# Altium PCB OpticalSensor.PcbDoc
Units mm, origin at the board's own origin, x right, y up, seen from the top; angles counter-clockwise.
Board outline 33 x 33 mm, 2 copper layers (Top Layer, Bottom Layer), stack 1.071 mm thick; 28 components, 19 nets, 149 pads, 34 vias.
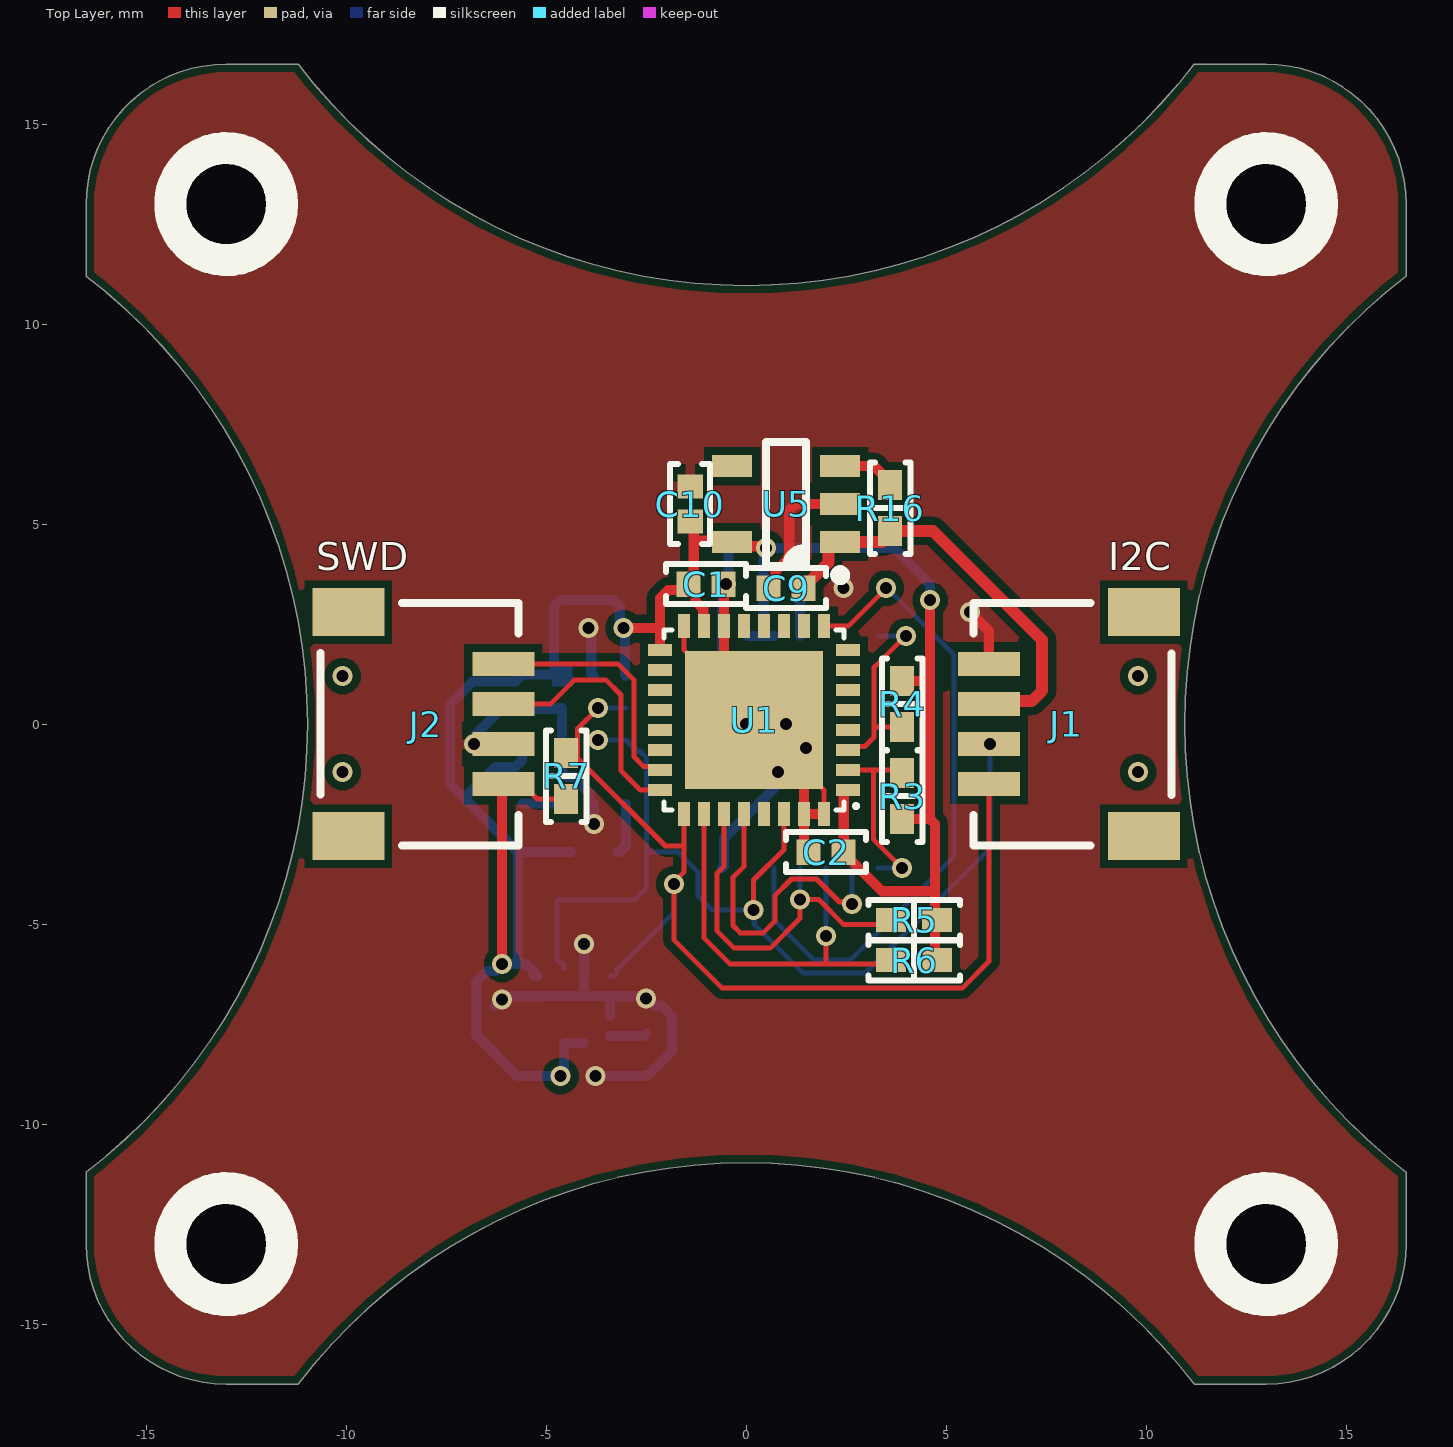
[diagram p0: Top Layer view]
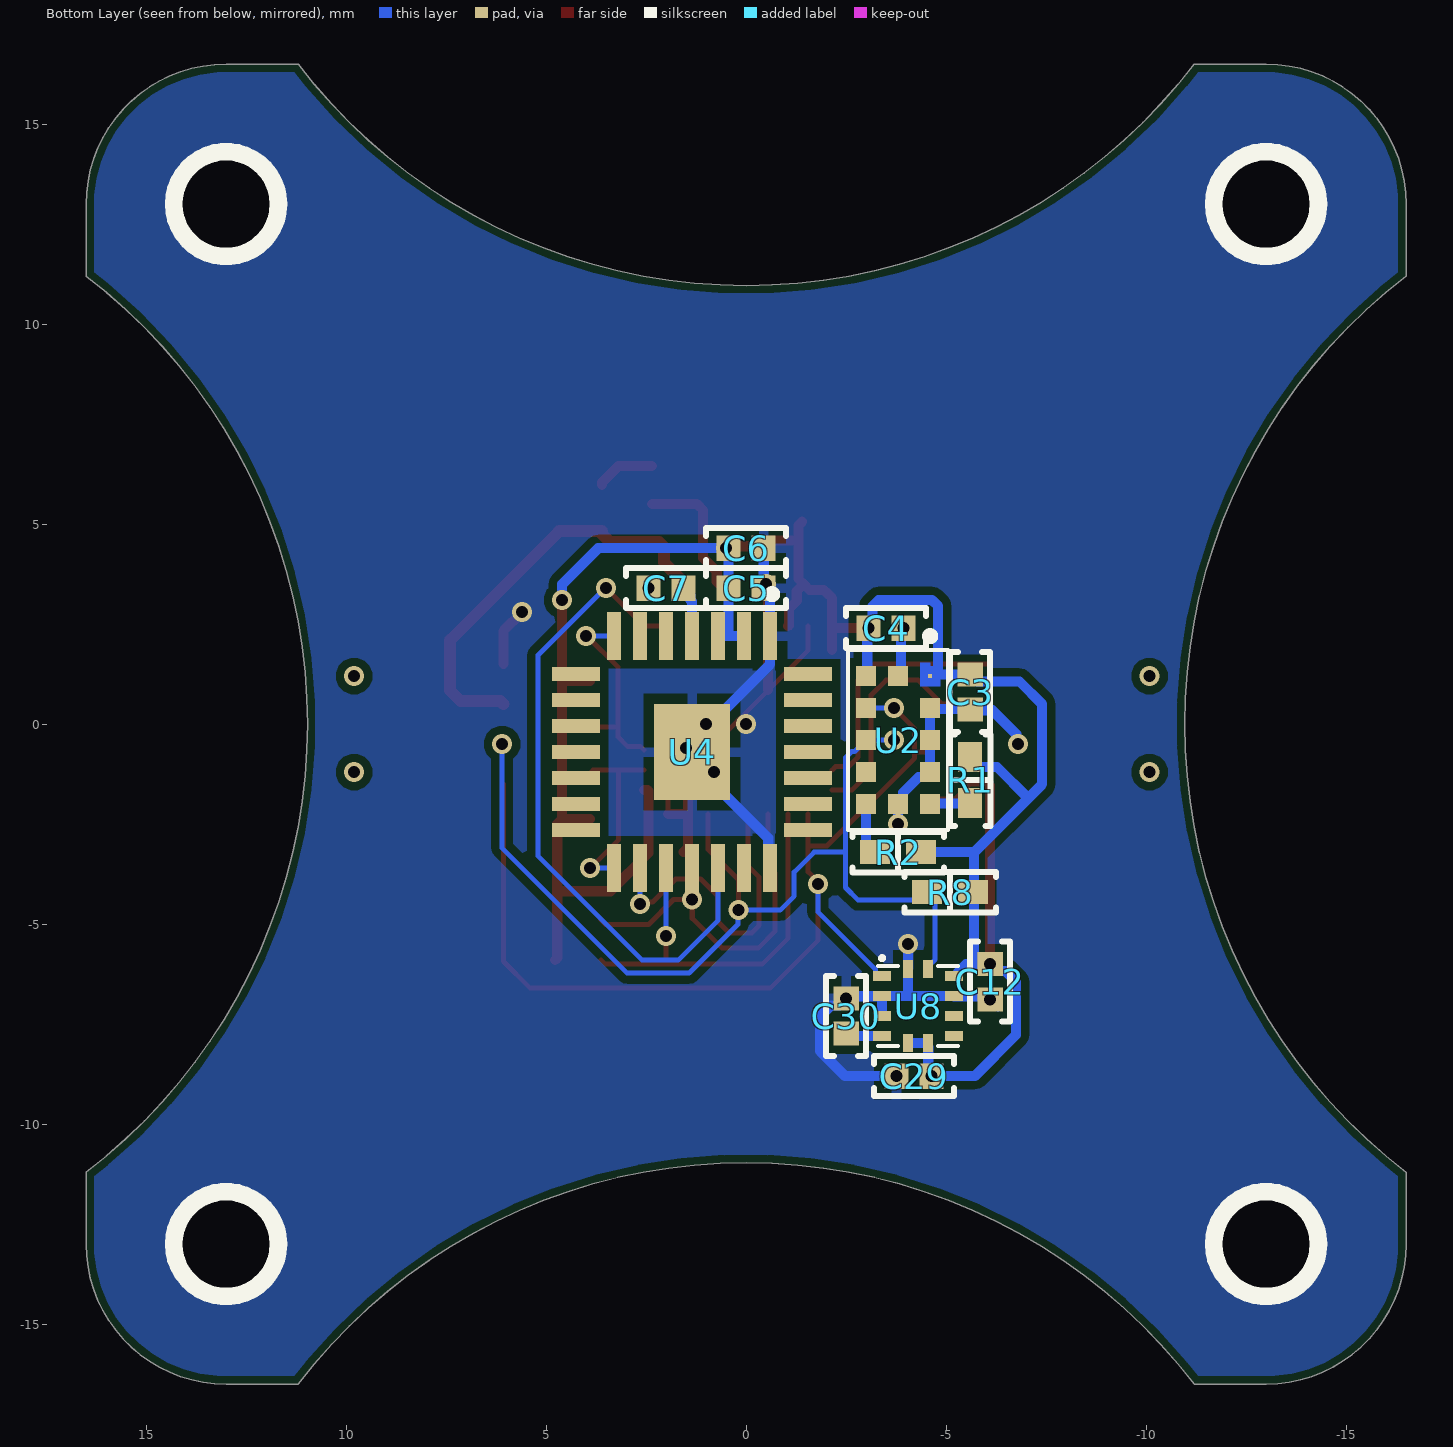
[diagram p1: Bottom Layer view, seen from below]

## Layer stack, top to bottom
Top Solder: solder mask 0.0102, Solder Resist, Dk 3.5
Top Layer: signal copper 0.0356
Dielectric 1: dielectric 1, FR-4, Dk 4.8
Bottom Layer: signal copper 0.0356
Bottom Solder: solder mask 0.0102, Solder Resist, Dk 3.5

## Board outline
-16.5,-13 ccw(c-13,-13) -13,-16.5 -11.2,-16.5 cw(c0,-25.063) 11.2,-16.5 13,-16.5 ccw(c13,-13) 16.5,-13 16.5,-11.2 cw(c25.063,0) 16.5,11.2 16.5,13 ccw(c13,13) 13,16.5 11.2,16.5 cw(c0,25.063) -11.2,16.5 -13,16.5 ccw(c-13,13) -16.5,13 -16.5,11.2 cw(c-25.063,0) -16.5,-11.2

## Design rules (kind name [scope] priority, off if disabled: settings)
BoardOutlineClearance [All] p1: gap=0.2 ignorepadtopadclearanceinfootprint=FALSE
Clearance "PolyGon Pour Clearance" [InPolygon] p1: gap=0.2 ignorepadtopadclearanceinfootprint=FALSE
Clearance [All] p2: gap=0.2 ignorepadtopadclearanceinfootprint=TRUE except(0: Arc-Hole Track-Hole SMDPad-Hole THPad-Hole Via-Hole Fill-Hole Poly-Hole Region-Hole Text-Hole)
HoleSize [All] p1: absolutevalues=TRUE maxlimit=6.3 minlimit=0.02 maxpercent=80.000 minpercent=20.000
PolygonConnect PolygonRelief [IsPolygon and not (IsNamedPolygon('PolygonDirect'))] p1: thpad.connectstyle=Relief thpad.reliefconductorwidth=0.254 thpad.reliefentries=4 thpad.polygonreliefangle="90 Angle" thpad.airgapwidth=0.254 smdpad.connectstyle=Relief smdpad.reliefconductorwidth=0.254 smdpad.reliefentries=4 smdpad.polygonreliefangle="90 Angle" smdpad.airgapwidth=0.254 via.connectstyle=Direct via.reliefconductorwidth=0.254 via.reliefentries=4 via.polygonreliefangle="90 Angle" via.airgapwidth=0.254
PolygonConnect [All] p2: connectstyle=Direct reliefconductorwidth=0.254 reliefentries=4 polygonreliefangle="90 Angle" airgapwidth=0.254
RoutingVias [All] p1: holewidth=0.3 width=0.5 viastyle="Through Hole" minholewidth=0.3 minwidth=0.5 maxholewidth=0.7 maxwidth=1.27
SolderMaskExpansion [All] p1: expansion=0.102 istentingtop=FALSE
Width [All] p1: maxlimit=0.712 minlimit=0.127 preferedwidth=0.254
29 further rules are at their usual default settings.

## Classes and differential pairs
component class OpticalSensor: C5 C6 C7 J1 U4
component class U_VL53L: C3 C4 R1 R2 U2
component class U_STM32: C1 C2 J2 R3 R4 R5 R6 R7 R8 U1
component class U_LIS3MDL: C12 C29 C30 U8
component class U_3V3_LDO_MCU: C9 C10 R16 U5

## Components (designator, comment, footprint, x,y, rotation, side; value= is the part's Value field where it differs from the comment)
C1 "0.1 µF" "CAP 0402_1005" -1,3.5 r180 top
C2 "0.1 µF" "CAP 0402_1005" 2,-3.2 r0 top
C3 "0.1 µF" "CAP 0402_1005" -5.6,0.8 r90 bottom
C4 "0.1 µF" "CAP 0402_1005" -3.5,2.4 r0 bottom
C5 "1 µF" "CAP 0402_1005" 0,3.4 r0 bottom
C6 "1 µF" "CAP 0402_1005" 0,4.4 r0 bottom
C7 "1 µF" "CAP 0402_1005" 2,3.4 r180 bottom
C9 "0.1 µF" "CAP 0402_1005" 1,3.4 r0 top
C10 "0.1 µF" "CAP 0402_1005" -1.4,5.5 r270 top
C12 "1 µF" "CAP 0402_1005" -6.1,-6.44 r270 bottom
C29 "0.1 µF" "CAP 0402_1005" -4.2,-8.8 r0 bottom
C30 "0.1 µF" "CAP 0402_1005" -2.5,-7.3 r90 bottom
J1 "SM04B-SRSS-TB(LF)(SN)" "JST SM04B-SRSS-TB" 8.1,0 r270 top
J2 "SM04B-SRSS-TB(LF)(SN)" "JST SM04B-SRSS-TB" -8.1,0 r90 top
R1 "10k" "RES 0402_1005" -5.6,-1.4 r270 bottom
R2 "10k" "RES 0402_1005" -3.8,-3.2 r0 bottom
R3 "10 k" "RES 0402_1005" 3.9,-1.8 r270 top
R4 "10 k" "RES 0402_1005" 3.9,0.5 r90 top
R5 "10 k" "RES 0402_1005" 4.2,-4.9 r0 top
R6 "10 k" "RES 0402_1005" 4.2,-5.9 r0 top
R7 "4.7 k" "RES 0402_1005" -4.5,-1.3 r270 top
R8 "4.7 k" "RES 0402_1005" -5.1,-4.2 r180 bottom
R16 "10k Ohms" "RES 0402_1005" 3.6,5.4 r270 top
U1 "STM32G431KBU3" QFN50P400X400X60-32N 0.2,0.1 r180 top
U2 "VL53L3CXV0DH/1" XDCR_VL53L3CXV0DH/1 -3.8,-0.4 r270 bottom
U4 "PMW3901" PMW3901 1.35,-0.7 r270 bottom
U5 "MIC5504" "TI SOT-23-5 DBV" 1,5.5 r180 top
U8 "LIS3MDL" LGA12_ST -4.3,-7.05 r180 bottom

## Footprints (in the part's own frame and the unit in brackets; to place one, negate y for a bottom-side part, rotate by r counter-clockwise, add the part's x,y. Pads: shape width x height; smd on the part's side, far side on the other; paste and mask are expansions set on the pad)
"CAP 0402_1005" [mm] "Chip Capacitor, 2-Leads, Body 1.02x0.51mm, IPC Medium Density"
  rect 0.6x0.64 smd: 1(-0.44,0) 2(0.44,0)
  silkscreen extent -1,-0.5 1,0.5, body extent -0.5,-0.26 0.5,0.26, height 0.52
"JST SM04B-SRSS-TB" [mm] "1.0mm pitch/Disconnectable Crimp style connector"
  rect 0.6x1.55 smd: 1(-1.5,-2.032) 2(-0.5,-2.032) 3(0.5,-2.032) 4(1.5,-2.032)
  rect 1.2x1.8 smd: M(-2.8,1.843) M(2.8,1.843)
  silkscreen extent -3.03,-2.41 3.03,2.54, body extent -3,-2.38 3,2.57, height 2.95
LGA12_ST [mm]
  rect 0.45x0.25 smd: 1(-0.9,0.75) 2(-0.9,0.25) 3(-0.9,-0.25) 4(-0.9,-0.75) 7(0.9,-0.75) 8(0.9,-0.25) 9(0.9,0.25) 10(0.9,0.75)
  rect 0.25x0.45 smd: 5(-0.25,-0.925) 6(0.25,-0.925) 11(0.25,0.925) 12(-0.25,0.925)
  silkscreen extent -1,-1 1,1.25, body extent -1,-1 1,1, height 0.25
PMW3901 [mm]
  rect 1.2x0.35 smd: 1(-2.9,1.95) 2(-2.9,1.3) 3(-2.9,0.65) 4(-2.9,0) 5(-2.9,-0.65) 6(-2.9,-1.3) 7(-2.9,-1.95) 15(2.9,-1.95) 16(2.9,-1.3) 17(2.9,-0.65) 18(2.9,0) 19(2.9,0.65) 20(2.9,1.3) 21(2.9,1.95)
  rect 0.35x1.2 smd: 8(-1.95,-2.9) 9(-1.3,-2.9) 10(-0.65,-2.9) 11(0,-2.9) 12(0.65,-2.9) 13(1.3,-2.9) 14(1.95,-2.9) 22(1.95,2.9) 23(1.3,2.9) 24(0.65,2.9) 25(0,2.9) 26(-0.65,2.9) 27(-1.3,2.9) 28(-1.95,2.9)
  rect 2.4x1.9 smd: 29(0,0)
  silkscreen extent -4.05,1.9 -3.85,2.1, body extent -3,-3 3,3, height 3.3
QFN50P400X400X60-32N [mm]
  rect 3.45x3.45 smd mask+0.051: 0(0,0)
  rect 0.6x0.3 smd mask+0.051: 1(-2.35,1.75) 2(-2.35,1.25) 3(-2.35,0.75) 4(-2.35,0.25) 5(-2.35,-0.25) 6(-2.35,-0.75) 7(-2.35,-1.25) 8(-2.35,-1.75) 17(2.35,-1.75) 18(2.35,-1.25) 19(2.35,-0.75) 20(2.35,-0.25) 21(2.35,0.25) 22(2.35,0.75) 23(2.35,1.25) 24(2.35,1.75)
  rect 0.3x0.6 smd mask+0.051: 9(-1.75,-2.35) 10(-1.25,-2.35) 11(-0.75,-2.35) 12(-0.25,-2.35) 13(0.25,-2.35) 14(0.75,-2.35) 15(1.25,-2.35) 16(1.75,-2.35) 25(1.75,2.35) 26(1.25,2.35) 27(0.75,2.35) 28(0.25,2.35) 29(-0.25,2.35) 30(-0.75,2.35) 31(-1.25,2.35) 32(-1.75,2.35)
  silkscreen extent -2.6,-2.25 2.25,2.25, body extent -2.25,-2.25 2.25,2.25, height 0.68
"RES 0402_1005" [mm] "Chip Resistor, 2-Leads, Body 1.0x0.5mm, IPC Medium Density"
  rect 0.75x0.6 smd: 1(-0.575,0) 2(0.575,0)
  silkscreen extent -1.14,-0.51 1.14,0.51, body extent -0.5,-0.25 0.5,0.25, height 0.35
"TI SOT-23-5 DBV" [mm] "SOT23, 5-Leads, Body 2.90x2.80mm, Pitch 0.95mm, IPC Medium Density"
  rect 1x0.55 smd: 1(-1.35,0.95) 2(-1.35,0) 3(-1.35,-0.95) 4(1.35,-0.95) 5(1.35,0.95)
  silkscreen extent -1.48,-1.55 0.5,1.9, body extent -1.44,-1.42 1.39,1.48, height 1.5
XDCR_VL53L3CXV0DH/1 [mm]
  rect 0.1x0.1 smd paste-1 mask+0: 1(-1.6,0.8)
  rect 0.5x0.5 smd: 2(-0.8,0.8) 3(0,0.8) 4(0.8,0.8) 5(1.6,0.8) 6(1.6,0) 7(1.6,-0.8) 8(0.8,-0.8) 9(0,-0.8) 10(-0.8,-0.8) 11(-1.6,-0.8) 12(-1.6,0)
  Top Layer region: -1.35,0.55 -1.93,0.55 -1.93,0.8 -1.85,0.8 -1.85,1.05 -1.35,1.05
  silkscreen extent -2.7,-1.25 2.25,1.25, body extent -2.2,-1.2 2.2,1.2, height 1.05

## Part data
C1 C2 C3 C4 C9 C10 C29 C30: library part C0402C104K4RACAUTO, "CAP CER 0.1UF 16V X7R 0402", Device Package="0402 (1005 Metric)", Manufacturer=KEMET, Operating Temperature="-55°C ~ 125°C", Ratings=AEC-Q200, Supplier Part Number 1=399-6828-1-ND, Temperature Coefficient=X7R, Tolerance=±10%, Voltage - Rated=16V, Applications="Automotive, Bypass, Decoupling", Capacitance="0.1 µF", ComponentLink1Description=Datasheet, ComponentLink1URL=https://api.kemet.com/component-edge/download/specsheet/C0402C104K4RACAUTO.pdf, ComponentLink2Description="DigiKey Link", ComponentLink2URL=https://www.digikey.com/en/products/detail/kemet/C0402C104K4RACAUTO/3314827, LastUpdated="8/14/2022 9:05:51 PM", Lifecycle Status=Active, Minimum Order=1, Mounting Type="Surface Mount, MLCC", Package / Case="0402 (1005 Metric)", Packaging=TapeAndReel, Part Number=C0402C104K4RACAUTO, Part Status=Active, PartId=3024, Price=0.01, Series="SMD Auto X7R", Size / Dimension="0.039\" L x 0.020\" W (1.00mm x 0.50mm)", Supplier 1=DigiKey, Thickness (Max)="0.022\" (0.55mm)"
C5 C6 C7 C12: library part C0402C104K4RACAUTO, "CAP CER 0.1UF 16V X7R 0402", Capacitance="0.1 µF", Device Package="0402 (1005 Metric)", Manufacturer=KEMET, Operating Temperature="-55°C ~ 125°C", Ratings=AEC-Q200, Supplier Part Number 1=399-6828-1-ND, Temperature Coefficient=X7R, Tolerance=±10%, Voltage - Rated=16V, Applications="Automotive, Bypass, Decoupling", ComponentLink1Description=Datasheet, ComponentLink1URL=https://api.kemet.com/component-edge/download/specsheet/C0402C104K4RACAUTO.pdf, ComponentLink2Description="DigiKey Link", ComponentLink2URL=https://www.digikey.com/en/products/detail/kemet/C0402C104K4RACAUTO/3314827, LastUpdated="8/14/2022 9:05:51 PM", Lifecycle Status=Active, Minimum Order=1, Mounting Type="Surface Mount, MLCC", Package / Case="0402 (1005 Metric)", Packaging=TapeAndReel, Part Number=C0402C104K4RACAUTO, Part Status=Active, PartId=3024, Price=0.01, Series="SMD Auto X7R", Size / Dimension="0.039\" L x 0.020\" W (1.00mm x 0.50mm)", Supplier 1=DigiKey, Thickness (Max)="0.022\" (0.55mm)"
J1 J2: "CONN HEADER SMD R/A 4POS 1MM", Current Rating (Amps)=0.7A, Insulation Color=Natural, Manufacturer="JST Sales America Inc.", Material Flammability Rating="UL94 V-0", Operating Temperature="-25°C ~ 85°C", Supplier Part Number 1=455-1804-1-ND, Voltage Rating=50V, ComponentLink1Description=Datasheet, ComponentLink1URL=http://www.jst-mfg.com/product/pdf/eng/eSH.pdf, ComponentLink2Description="DigiKey Link", ComponentLink2URL=http://digikey.com/product-detail/en/jst-sales-america-inc/SM04B-SRSS-TB-LF-SN/455-1804-1-ND/926875, Connector Type=Header, Contact Finish - Mating=Tin, Contact Finish - Post=Tin, Contact Material="Copper Alloy", Contact Shape=Square, Contact Type="Male Pin", Fastening Type=Push-Pull, Features="Solder Retention", Insulation Height="0.114\" (2.90mm)", Insulation Material="Polyamide (PA), Nylon", LastUpdated="1/12/2020 11:41:52 PM", Lifecycle Status=Active, Minimum Order=1, Mounting Type="Surface Mount, Right Angle", Number of Positions=4, Number of Positions Loaded=All, Number of Rows=1, Packaging=TapeAndReel, Part Number=SM04B-SRSS-TB(LF)(SN), Part Status=Active, PartId=62, Pitch - Mating="0.039\" (1.00mm)", Price=0.26, Series=SR, Shrouding="Shrouded - 4 Wall", Style="Board to Cable/Wire", Supplier 1=DigiKey, Termination=Solder
R1 R2 R16: library part CRCW0402330RJNEDC, "RES 330 OHM 5% 1/16W 0402", Device Package="0402 (1005 Metric)", Manufacturer="Vishay Dale", Operating Temperature="-55°C ~ 155°C", Power (Watts)="0.063W, 1/16W", Resistance="330 Ohms", Supplier Device Package=0402, Supplier Part Number 1=541-4123-1-ND, Temperature Coefficient=±200ppm/°C, Tolerance=±5%, ComponentLink1Description=Datasheet, ComponentLink1URL=http://www.vishay.com/docs/28773/crcwce3.pdf, ComponentLink2Description="DigiKey Link", ComponentLink2URL=https://www.digikey.com/en/products/detail/vishay-dale/CRCW0402330RJNEDC/7928545, Composition="Thick Film", Height - Seated (Max)="0.014\" (0.35mm)", LastUpdated="8/14/2022 9:23:31 PM", Lifecycle Status=Active, Minimum Order=1, Number of Terminations=2, Package / Case="0402 (1005 Metric)", Packaging=CutTape, Part Number=CRCW0402330RJNEDC, Part Status=Active, PartId=15989, Price=0.01, Series=CRCW-C, Size / Dimension="0.039\" L x 0.020\" W (1.00mm x 0.50mm)", Supplier 1=DigiKey
R3 R4 R5 R6: library part RT0402DRE0710KL, "RES SMD 10K OHM 0.5% 1/16W 0402", Device Package="0402 (1005 Metric)", Manufacturer=Yageo, Operating Temperature="-55°C ~ 155°C", Power (Watts)="0.063W, 1/16W", Supplier Device Package=0402, Supplier Part Number 1=311-2217-1-ND, Temperature Coefficient=±50ppm/°C, Tolerance=±0.5%, ComponentLink1Description=Datasheet, ComponentLink1URL=https://www.yageo.com/upload/media/product/productsearch/datasheet/rchip/PYu-RT_1-to-0.01_RoHS_L_11.pdf, ComponentLink2Description="DigiKey Link", ComponentLink2URL=https://www.digikey.com/en/products/detail/yageo/RT0402DRE0710KL/1071269, Composition="Thin Film", Height - Seated (Max)="0.014\" (0.35mm)", LastUpdated="2/9/2024 8:29:56 PM", Lifecycle Status=Active, Minimum Order=1, Number of Terminations=2, Package / Case="0402 (1005 Metric)", Packaging=TapeAndReel, Part Number=RT0402DRE0710KL, Part Status=Active, PartId=9812, Price=0.02, Resistance="10 k", Series=RT, Size / Dimension="0.039\" L x 0.020\" W (1.00mm x 0.50mm)", Supplier 1=DigiKey
R7 R8: library part RT0402DRE0710KL, "RES SMD 10K OHM 0.5% 1/16W 0402", Device Package="0402 (1005 Metric)", Manufacturer=Yageo, Operating Temperature="-55°C ~ 155°C", Power (Watts)="0.063W, 1/16W", Resistance="10 k", Supplier Device Package=0402, Supplier Part Number 1=311-2217-1-ND, Temperature Coefficient=±50ppm/°C, Tolerance=±0.5%, ComponentLink1Description=Datasheet, ComponentLink1URL=https://www.yageo.com/upload/media/product/productsearch/datasheet/rchip/PYu-RT_1-to-0.01_RoHS_L_11.pdf, ComponentLink2Description="DigiKey Link", ComponentLink2URL=https://www.digikey.com/en/products/detail/yageo/RT0402DRE0710KL/1071269, Composition="Thin Film", Height - Seated (Max)="0.014\" (0.35mm)", LastUpdated="2/9/2024 8:29:56 PM", Lifecycle Status=Active, Minimum Order=1, Number of Terminations=2, Package / Case="0402 (1005 Metric)", Packaging=TapeAndReel, Part Number=RT0402DRE0710KL, Part Status=Active, PartId=9812, Price=0.02, Series=RT, Size / Dimension="0.039\" L x 0.020\" W (1.00mm x 0.50mm)", Supplier 1=DigiKey
U1: "MCU UFQFPN-32"
U2: "Optical Sensor 118.110 (3m) I2C Output", Package=None, Availability=Unavailable, MF=STMicroelectronics, MP=VL53L3CXV0DH/1, Price=None, SnapEDA_Link=https://www.snapeda.com/parts/VL53L3CXV0DH/1/STMicroelectronics/view-part/4775788/?ref=snap
U4: "PMW3901. Optical Flow Sensor"
U5: library part MIC5504-3.3YM5, "3.3V LDO"
U8: "Magnetometer"

## Free pads (board coordinates)
  round 1.524 hole 2.2 unplated: 1(-13,-13) 1(-13,13) 1(13,-13) 1(13,13)

## Via types
v1: diameter 0.5, hole 0.3, Top Layer to Bottom Layer, tented both sides, 34 vias

## Nets (pads, with @x,y where several pads share a name; then routed paths per layer and width w, separated by ;. In a path a pad name is that pad's centre, name@x,y a point inside that pad or via, vN(x,y) a via of type N, cw(c..) or ccw(c..) an arc to the next point about the centre after c; other vN are vias at no path point)
3V3: C1.2 C2.2 C3.2 C4.2 C5.2 C6.2 C10.2 C12.1 C29.1 J2.1 R1.1 R2.1 R3.2 R4.2 R5.2 R6.2 R7.2 R8.2 U1.1 U1.15 U1.17 U2.1 U2.11 U4.2 U4.3 U5.5 U8.5 U8.6 U8.10 | length 62.7
  Top Layer w0.127: J2.1 -5.593,-1.5 -5.218,-1.875 R7.2 ; 4.723,-4.177 4.75,-4.204
  Top Layer w0.254: v1(-6.1,-6) -6.1,-1.532 J2.1 ; v1(-3.06,2.4) -2.15,2.4 ; U1.17 -2.15,2.4 ; -2.001,3.3 -2.15,3.151 -2.15,2.4 ; -2,3.3 -1.945,3.355 -1.585,3.355 C1.2 ; C10.2 -1.31,4.97 -1.31,4.595 ; U1.15 -1.073,2.473 -1.073,2.885 -1.267,3.079 -1.267,3.327 C1.2 ; U5.5@-0.367,4.533 -0.429,4.595 -1.31,4.595 ; U5.5 -0.247,4.447 0.453,4.447 v1(0.5,4.4) ; U1.1 2.463,-1.65 2.44,-1.673 C2.2 2.44,-3.22 3.397,-4.177 4.723,-4.177 ; R3.2 4.6,-2.375 ; R4.2 4.6,1.075 ; v1(4.6,3.1) 4.6,1.075 ; R6.2 4.723,-5.848 4.723,-4.177 ; C1.2 -1.31,3.63 -1.31,4.595 ; 4.6,-2.375 4.6,1.075 ; 4.6,-2.375 4.723,-2.498 4.723,-4.177
  Bottom Layer w0.254: R1.1 -5.6,-0.9 -5.773,-1.073 -6.273,-1.073 -7.05,-1.85 ; U8.10 -5.296,-6.3 -5.298,-6.298 -5.298,-6.202 -5.5,-6 -5.7,-6 ; U2.1 -4.64,1.24 -4.85,1.24 ; U8.6@-4.552,-8.073 -4.552,-8.712 v1(-4.64,-8.8) -5.716,-8.8 -6.747,-7.769 -6.747,-6.445 -6.475,-6.173 -6.273,-6.173 v1(-6.1,-6) -5.7,-6 ; U8.6@-4.55,-8.071 U8.6@-4.55,-7.977 ; U8.6 U8.6@-4.55,-7.977 ; R2.1 -5.7,-3.2 ; U8.5 U8.6 U8.6@-4.55,-7.977 ; v1(-3.06,2.4) -3.16,2.5 -3.16,2.951 -3.308,3.1 -4.651,3.1 -4.8,2.951 -4.8,1.29 -4.85,1.24 ; C4.2@-3.03,2.37 -3.03,1.23 U2.11 ; U4.2 0.375,2.2 ; U4.3 0.375,2.2 ; v1(4.6,3.1) 4.6,3.5 3.7,4.4 v1(0.5,4.4) C6.2 C5.2 0.44,2.265 0.375,2.2 ; -7.05,-1.85 -5.7,-3.2 ; -7.05,-1.85 -7.4,-1.5 -7.4,0.5 -6.833,1.067 -5.773,1.067 C3.2 -4.85,1.24 ; -5.7,-6 -5.7,-3.2
5V: C9.2 J1.2 R16.2 U5.1 | length 10.7
  Top Layer w0.3: C9.2 1.44,3.42 2.054,4.034 2.054,4.425 2.179,4.55 3.4,4.55 3.6,4.75 R16.2 ; R16.2 4.676,4.824 7.4,2.1 7.4,0.839 7.136,0.575 6.143,0.575 J1.2
GND: C1.1 C2.1 C3.1 C4.1 C5.1 C6.1 C7.1 C9.1 C10.1 C12.2 C29.2 C30.2 J1.1 J2.2 U1.0 U1.14 U1.16 U1.31 U1.32 U2.2 U2.3 U2.4 U2.6 U2.12 U4.1 U4.21 U4.29 U5.2 U8.2 U8.3 U8.9 U8.12 | length 43.1
  Top Layer w0.127: U1.16 -1.55,1.85 -0.55,0.85 U1.0 1.45,-1.15 1.95,-1.65 U1.32
  Top Layer w0.254: C1.1 -0.555,3.495 -0.555,2.455 U1.14 U1.0@-0.55,0.85 ; C9.1 0.733,3.573 0.733,3.817 1.077,4.161 1.077,5.351 1.226,5.5 U5.2 ; U1.0@1.45,-1.15 U1.31 ; C2.1 1.45,-3.09 U1.31 ; U1.32 U1.31 ; v1(5.6,2.8) 6.068,2.332 J1.1
  Bottom Layer w0.254: v1(-6.8,-0.5) -6.753,-0.453 -6.753,-0.253 -6.152,0.348 -5.612,0.348 -5.58,0.38 -4.723,0.38 -4.703,0.4 U2.2 U2.3 U2.4 -4.477,-1.323 -4.315,-1.323 -3.923,-1.714 -3.923,-1.877 U2.6 ; C12.2@-6.293,-7.053 -6.12,-6.88 v1(-6.1,-6.88) -6.022,-6.802 -5.202,-6.802 U8.9 -4.1,-6.8 ; v1@-4,-5.5 -4,-5.567 -4.048,-5.615 -4.048,-6.123 U8.12 -4.05,-6.75 -4.1,-6.8 ; v1(-3.94,2.4) -3.87,2.33 -3.87,1.27 U2.12 ; v1(-3.8,-2.497) U2.6 ; v1(-3.76,-8.8) -2.478,-8.8 -1.853,-8.175 -1.853,-7.305 -2.125,-7.033 -2.327,-7.033 v1(-2.5,-6.86) -2.558,-6.802 -3.398,-6.802 U8.2 ; U8.3 U8.2 ; U4.21 -0.552,-3.552 -0.552,-2.852 1.35,-0.95 U4.29 ; U4.1@-0.552,2.152 U4.1 ; C6.1 C5.1 -0.6,3.24 U4.1 ; U4.29@1.4,-0.7 U4.29 ; -4.1,-6.8 U8.2 ; U4.1 -0.6,1.5 1.35,-0.45 U4.29
  other v1: -4.05,-5.5 0.8,-1.2 1.5,-0.6 0,0 1,0 2.44,3.4 -0.5,3.5
I2C.SCL: J1.4 R7.1 U1.25 U2.10 U8.1 | length 25.4
  Top Layer w0.127: R7.1 -4.475,-0.7 R7.1@-4.213,-0.7 ; v1(-3.7,0.4) -4.213,-0.113 R7.1@-4.213,-0.7 ; v1@-1.829,-3.971 -1.55,-3.693 -1.55,-3.046 ; v1(-1.8,-4) -1.8,-5.4 -0.6,-6.6 5.4,-6.6 6.068,-5.932 J1.4 ; U1.25 -1.55,-3.046 ; R7.1@-4.213,-0.7 -4.213,-0.85 -2.017,-3.046 -1.55,-3.046
  Bottom Layer w0.127: v1(-3.7,0.4) U2.10 ; U8.1 -3.3,-6.3 -3.238,-6.238 -3.238,-6.138 -1.8,-4.7 v1(-1.8,-4)
I2C.SDA: J1.3 R8.1 U1.30 U2.9 U8.11 | length 25.8
  Top Layer w0.127: v1(0.186,-4.65) 0.186,-3.9 0.95,-3.136 U1.30
  Bottom Layer w0.127: U8.11 -4.55,-6.025 -4.611,-5.963 -4.649,-5.963 -4.724,-5.889 -4.724,-4.4 -2.8,-4.4 -2.487,-4.087 -2.487,-3.2 ; v1(-3.7,-0.4) U2.9 -2.714,-0.686 -2.641,-0.686 -2.487,-0.841 -2.487,-3.2 ; v1(6.1,-0.5) 6.1,-3.1 2.973,-6.227 1.427,-6.227 0.203,-5.003 0.203,-4.666 v1(0.186,-4.65) -0.85,-4.65 -1.2,-4.3 -1.2,-3.7 -1.7,-3.2 -2.487,-3.2
LIS3_MDL_DRDY: U8.8
NetC30_1: C30.1 U8.4 | length 0.9
  Bottom Layer w0.254: U8.4 -3.398,-7.798 -2.558,-7.798 C30.1
NetR16_1: R16.1 U5.3 | length 1.5
  Top Layer w0.254: U5.3 3.2,6.45 3.6,6.05 R16.1
PMW_MOTION: R3.1 U1.2 U4.15 | length 4.7
  Top Layer w0.127: U1.2 3.188,-1.15 ; v1(3.9,-3.6) 3.188,-2.888 3.188,-1.15 ; R3.1 3.825,-1.15 3.188,-1.15
  Bottom Layer w0.127: U4.15 v1(3.9,-3.6)
PMW_R\S\T\: R4.1 U1.3 U4.7 | length 5.1
  Top Layer w0.127: U1.3 2.637,-0.563 2.959,-0.563 3.2,-0.323 3.2,-0.075 ; R4.1 3.2,-0.075 ; v1(4,2.2) 3.977,2.2 3.2,1.423 3.2,-0.075
  Bottom Layer w0.127: U4.7 v1(4,2.2)
SPI.C\S\: U1.9 U4.19 | length 16.7
  Top Layer w0.127: U1.9 2.55,2.45 v1(3.5,3.4)
  Bottom Layer w0.127: U4.19 0.7,-4.9 1.7,-5.9 2.6,-5.9 5.2,-3.3 5.2,1.726 3.526,3.4 v1(3.5,3.4)
SPI.MISO: R5.1 U1.27 U4.18 | length 9.4
  Top Layer w0.127: U1.27 -0.55,-3.55 -0.723,-3.723 -0.723,-5.177 -0.3,-5.6 0.6,-5.6 1.347,-4.853 1.347,-4.389 v1(1.35,-4.387) 1.813,-4.387 2.44,-5.014 3.511,-5.014 R5.1
  Bottom Layer w0.127: v1(1.35,-4.387) U4.18
SPI.MOSI: U1.28 U4.16 | length 8.2
  Top Layer w0.127: U1.28 -0.05,-3.55 -0.327,-3.827 -0.327,-5.036 -0.146,-5.217 0.426,-5.217 0.717,-4.926 0.717,-4.293 1.137,-3.873 1.762,-3.873 2.336,-4.447 2.6,-4.447 v1(2.653,-4.5)
  Bottom Layer w0.127: U4.16 2.651,-3.601 2.651,-4.646 v1@2.653,-4.647
SPI.SCK: R6.1 U1.26 U4.17 | length 10.7
  Top Layer w0.127: U1.26 -1.05,-5.35 -0.4,-6 2,-6 ; v1(2,-5.3) 2,-6 ; R6.1 3.525,-6 2,-6
  Bottom Layer w0.127: v1@2,-5.487 v1(2,-5.3) U4.17
SWCLK: J2.3 U1.24 | length 6.4
  Top Layer w0.127: J2.3 -4.9,0.5 -4.3,1.1 -3.5,1.1 -3.127,0.727 -3.127,-1.163 -2.64,-1.65 U1.24
SWDIO: J2.4 U1.23 | length 6.1
  Top Layer w0.127: J2.4 -3.2,1.5 -2.8,1.1 -2.8,-0.823 -2.559,-1.064 -2.236,-1.064 U1.23
VL53_GPIO1: R2.2 U2.7 | length 1.3
  Bottom Layer w0.254: R2.2 -3.173,-3.2 -3,-3.027 U2.7
VL53_XSHUT: R1.2 U2.5 | length 1
  Bottom Layer w0.127: R1.2 R1.2@-5.588,-1.987
  Bottom Layer w0.254: R1.2@-5.588,-1.987 -4.613,-1.987 U2.5
VREG: C7.2 U4.4 | length 1.3
  Bottom Layer w0.254: U4.4 1.35,3.058 1.387,3.095 1.387,3.227 C7.2
pads on no net: J1.M J2.M U1.4 U1.5 U1.6 U1.7 U1.8 U1.10 U1.11 U1.12 U1.13 U1.18 U1.19 U1.20 U1.21 U1.22 U1.29 U2.8 U4.5 U4.6 U4.8 U4.9 U4.10 U4.11 U4.12 U4.13 U4.14 U4.20 U4.22 U4.23 U4.24 U4.25 U4.26 U4.27 U4.28 U5.4 U8.7
copper on no net:
  other v1: -10.086,-1.2 9.8,-1.2 -10.086,1.2 9.8,1.2

## Polygon pours and split planes (outlines as drawn)
GND on Bottom Layer "GND_L02_P000" (solid, pour order 0): -16.5,16.5 -16.5,-16.5 16.5,-16.5 16.5,16.5
GND on Top Layer "GND_L01_P001" (solid, pour order 1): -16.5,16.5 -16.5,-16.5 16.5,-16.5 16.5,16.5

## Silkscreen, mask and mechanical layers (free items; w line width, h text height)
Top Overlay:
  circle w0.8: c13,-13 r1.4
  circle w0.8: c-13,-13 r1.4
  circle w0.8: c13,13 r1.4
  circle w0.8: c-13,13 r1.4
  text "SWD" at -10.75,3.85 h0.7
  text "I2C" at 9.05,3.85 h0.7
Bottom Overlay:
  circle w0.44: c13,-13 r1.31
  circle w0.44: c-13,-13 r1.31
  circle w0.44: c13,13 r1.31
  circle w0.44: c-13,13 r1.31
Board:
  the board outline again, w0.1